# Altium PCB RGB_Matrix.PcbDoc
Units mm, origin at the board's own origin, x right, y up, seen from the top; angles counter-clockwise.
Board outline 66.5 x 59.5 mm, 2 copper layers (Top Layer, Bottom Layer); 30 components, 50 nets, 195 pads, 284 vias.
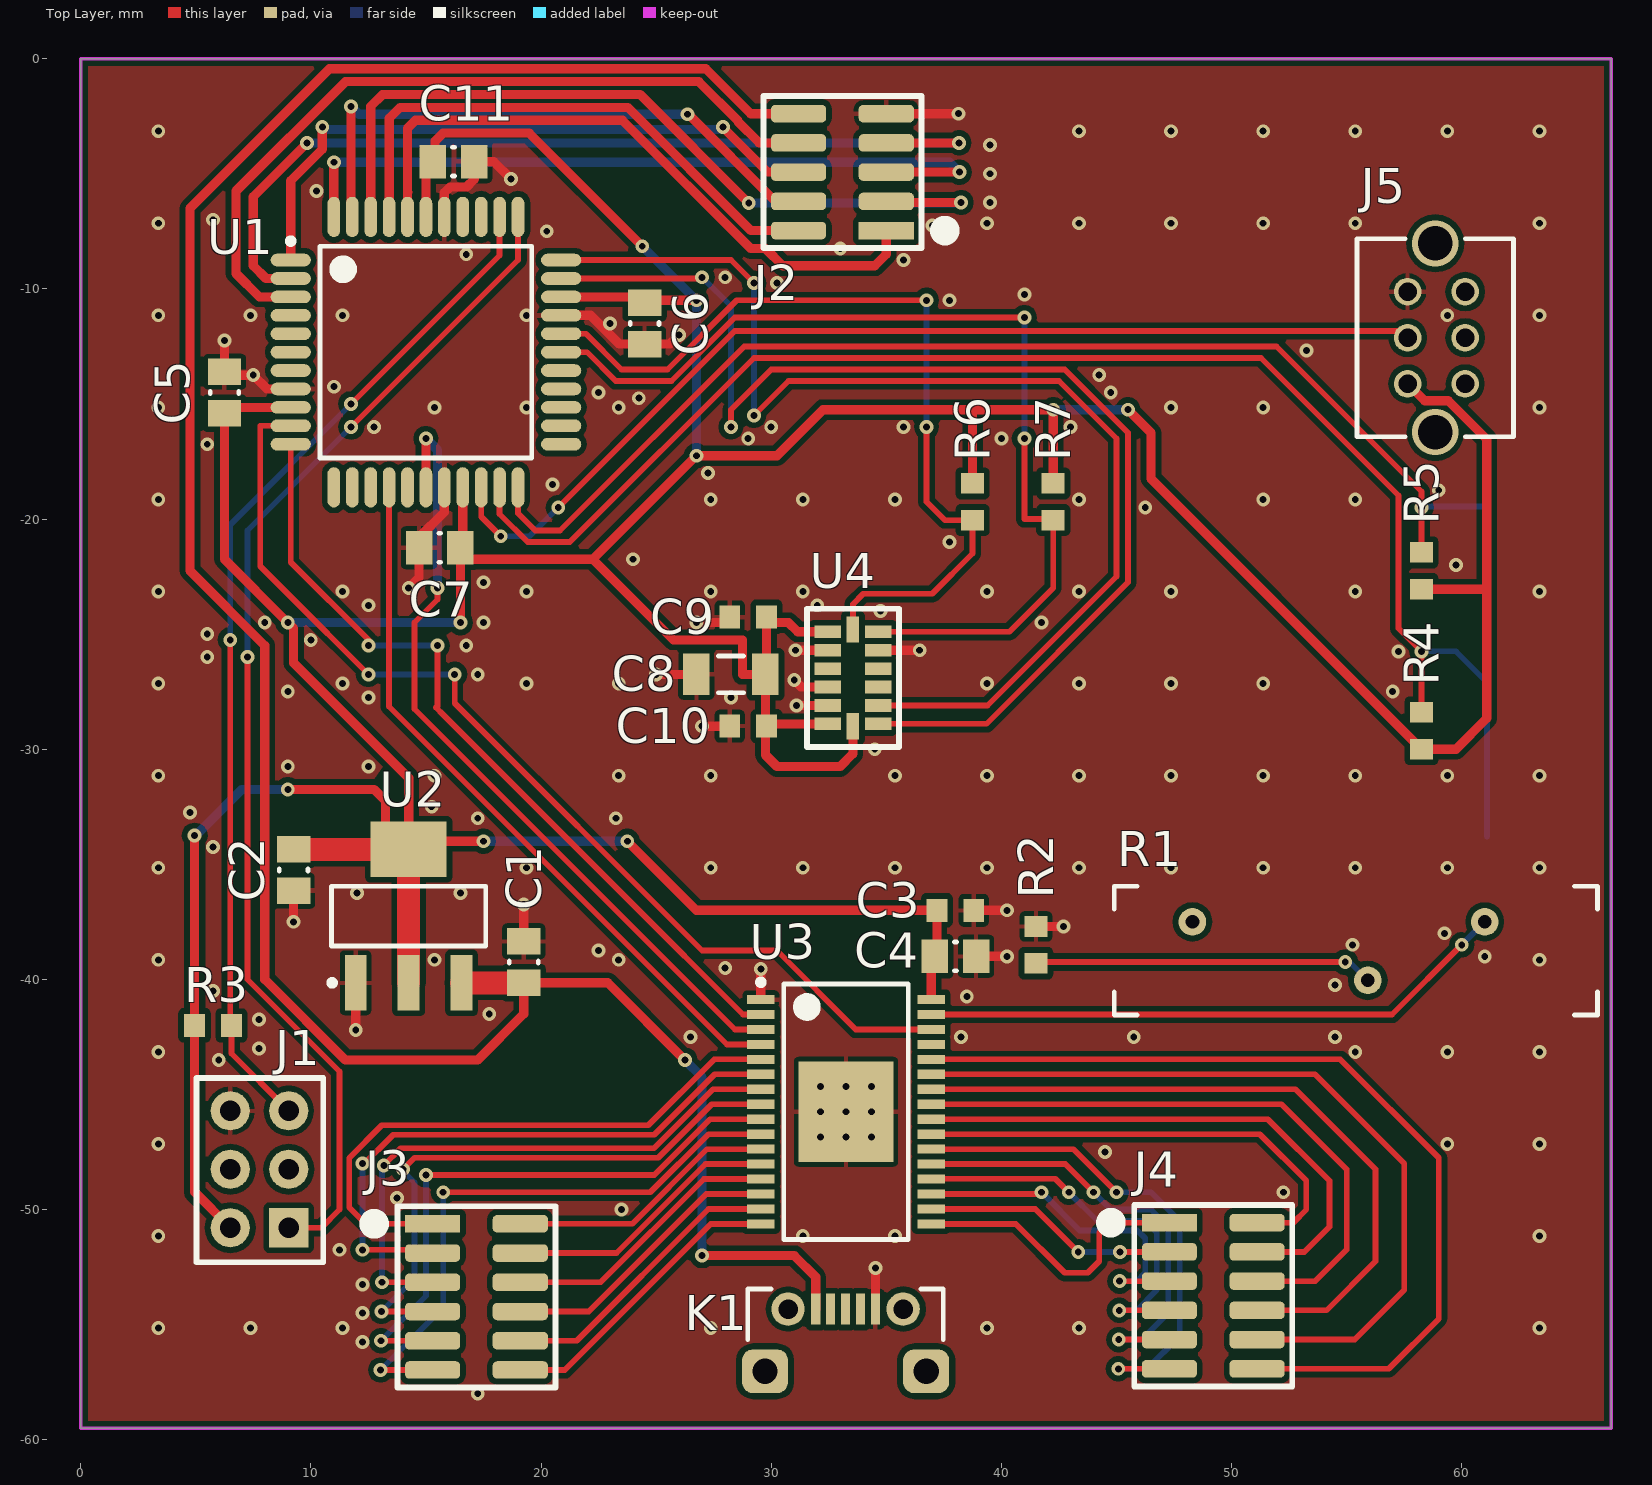
[diagram p0: Top Layer view]
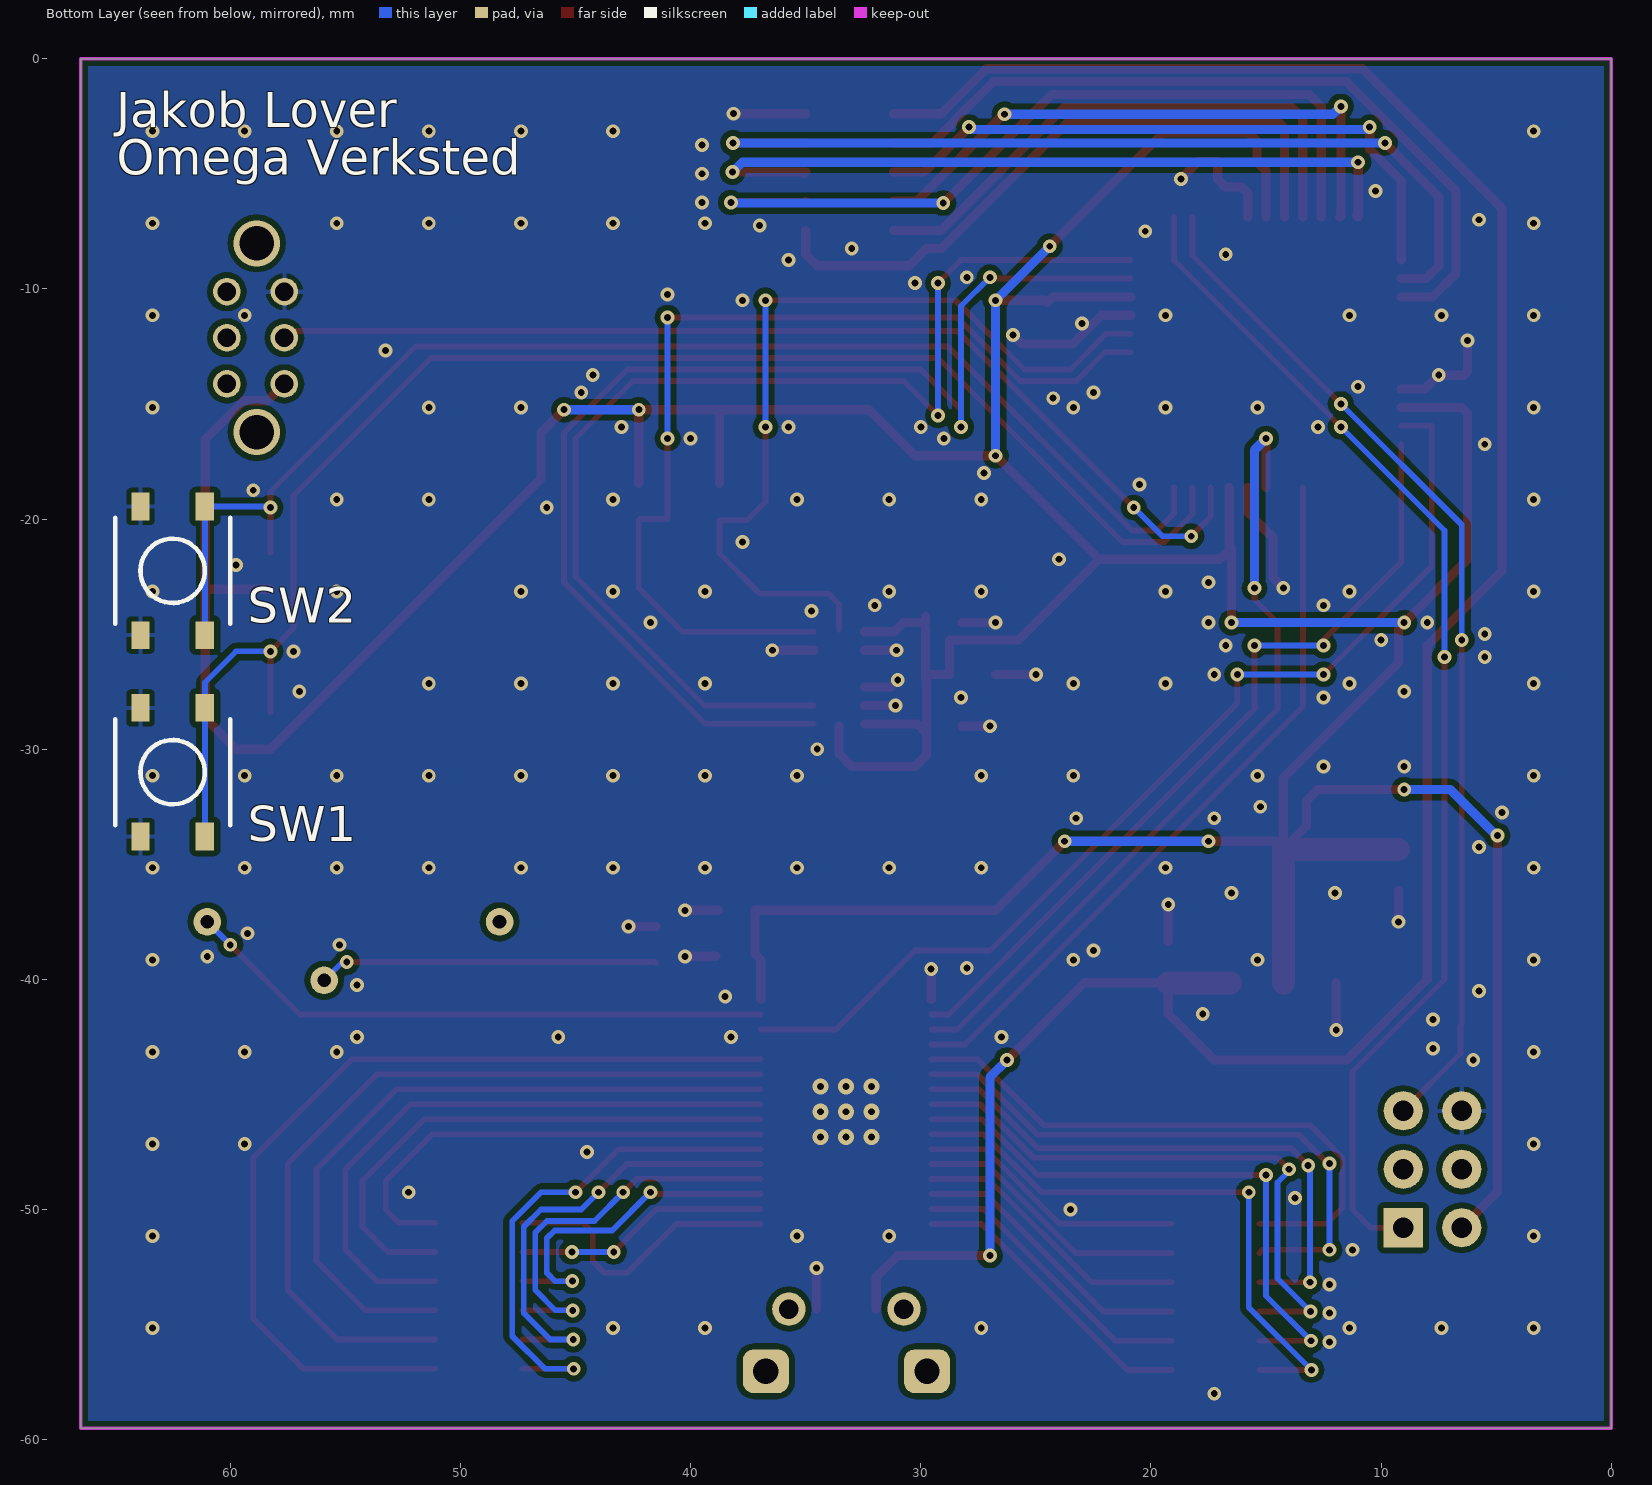
[diagram p1: Bottom Layer view, seen from below]

## Layer stack, top to bottom
Top Solder: solder mask 0.0102, Solder Resist, Dk 3.5
Top Layer: signal copper 0.0356
Dielectric 1: dielectric 0.32, FR-4, Dk 4.8
Bottom Layer: signal copper 0.0356
Bottom Solder: solder mask 0.0102, Solder Resist, Dk 3.5

## Board outline
0,-59.5 66.5,-59.5 66.5,0 0,0

## Design rules (kind name [scope] priority, off if disabled: settings)
Clearance [All] p1: gap=0.16 ignorepadtopadclearanceinfootprint=FALSE except(0: Arc-Text Arc-Hole Track-Text Track-Hole SMDPad-Text SMDPad-Hole THPad-Text THPad-Hole Via-Text Via-Hole Fill-Text Fill-Hole Poly-Text Poly-Hole Region-Text Region-Hole Text-Text Text-Hole; 0.25: Arc-Poly Track-Poly SMDPad-Poly THPad-Poly Via-Poly Fill-Poly Poly-Poly)
Height [All] p1: minheight=0 maxheight=200 prefheight=12.7
HoleSize [All] p1: absolutevalues=TRUE maxlimit=6.35 minlimit=0.3 maxpercent=80.000 minpercent=20.000
MinimumSolderMaskSliver [All] p1: minsoldermaskwidth=0.1
PlaneClearance [All] p1: clearance=1
PlaneConnect [All] p1: planeconnectstyle=Relief reliefexpansion=0.508 reliefentries=4 reliefconductorwidth=1 reliefairgap=0.254
PolygonConnect PolygonConnect_1 [IsVia] p1: connectstyle=Direct reliefconductorwidth=0.254 reliefentries=4 polygonreliefangle="90 Angle" airgapwidth=0.254
PolygonConnect [All] p2: connectstyle=Relief reliefconductorwidth=0.2 reliefentries=4 polygonreliefangle="90 Angle" airgapwidth=0.2
RoutingVias [All] p1: holewidth=0.3 width=0.6 viastyle="Through Hole" minholewidth=0.3 minwidth=0.6 maxholewidth=6.35 maxwidth=10
SilkToSolderMaskClearance [IsPad] p1: minsilkscreentomaskgap=0.155 clearancetoexposedcopper=TRUE
SolderMaskExpansion [All] p1: expansion=0.102
Width [All] p1: maxlimit=10 minlimit=0.16 preferedwidth=0.4
24 further rules are at their usual default settings.

## Components (designator, comment, footprint, x,y, rotation, side; value= is the part's Value field where it differs from the comment)
C1 "1uF" CAPC0805(2012)100_N 19.25,-39.25 r270 top
C2 "1uF" CAPC0805(2012)100_N 9.25,-35.25 r90 top
C3 "100nF" CAPC0603(1608)55_N 38,-37 r180 top
C4 "22nF" CAPC0805(2012)100_N 38,-39 r180 top
C5 "100nF" CAPC0805(2012)100_N 6.25,-14.5 r270 top
C6 "100nF" CAPC0805(2012)100_N 24.5,-11.5 r90 top
C7 "100nF" CAPC0805(2012)100_N 15.6,-21.25 r0 top
C8 "10uF" CAPC1206(3216)170_N 28.25,-26.75 r0 top
C9 "100nF" CAPC0603(1608)55_N 29,-24.25 r0 top
C10 "100nF" CAPC0603(1608)55_N 29,-29 r0 top
C11 "100nF" CAPC0805(2012)100_N 16.2,-4.475 r180 top
J1 "PDI Header" HEADER_3x2 9.04,-50.79 r90 top
J2 "2x5 SMD HEADER" "2x5 SMD HEADER" 35,-7.47 r180 top locked
J3 "2x6 SMD HEADER" "2x6 SMD HEADER" 15.29,-50.62 r0 top locked
J4 "2x6 SMD HEADER" "2x6 SMD HEADER" 47.3,-50.57 r0 top locked
J5 "Slide switch" OS202011MA0QS1 57.65,-14.125 r90 top
K1 "USB_CONNECTOR_5P" 105017-0001 33.25,-56.5 r0 top locked
R1 "Trimmepot 500ohm" TRIMPOT_3006P 55.4,-38.75 r0 top
R2 "1k6" RESC0603(1608)_N 41.5,-38.5 r270 top
R3 "100k" RESC0603(1608)_N 5.75,-42 r0 top
R4 "10k" RESC0603(1608)_N 58.25,-29.2 r270 top
R5 "10k" RESC0603(1608)_N 58.25,-22.25 r270 top
R6 "10k" RESC0603(1608)_N 38.75,-19.25 r90 top
R7 "10k" RESC0603(1608)_N 42.25,-19.25 r90 top
SW1 "Pushbutton SMD" SOIC254P500X160-4 62.5,-31 r180 bottom
SW2 "Pushbutton SMD" SOIC254P500X160-4 62.5,-22.25 r180 bottom
U1 "ATXMEGA-A4U" TQFP80P1200X1200X120-44N 15,-12.75 r0 top locked
U2 "TLV1117-33CDCYR" SOT230P700X180-4N 14.25,-37.25 r90 top
U3 "TLC5947" TLC5947 33.25,-45.75 r0 top locked
U4 "ADXL345" ADXL345 32.425,-24.9 r0 top

## Footprints (in the part's own frame and the unit in brackets; to place one, negate y for a bottom-side part, rotate by r counter-clockwise, add the part's x,y. Pads: shape width x height; smd on the part's side, far side on the other; paste and mask are expansions set on the pad)
"2x5 SMD HEADER" [mm]
  rect 2.4x0.76 smd: 1(0,0)
  rrect50% 2.4x0.76 smd: 2(3.81,0) 3(0,-1.27) 4(3.81,-1.27) 5(0,-2.54) 6(3.81,-2.54) 7(0,-3.81) 8(3.81,-3.81) 9(0,-5.08) 10(3.81,-5.08)
  silkscreen extent -2.68,-5.84 5.33,0.76
"2x6 SMD HEADER" [mm]
  rect 2.4x0.76 smd: 1(0,0)
  rrect50% 2.4x0.76 smd: 2(3.81,0) 3(0,-1.27) 4(3.81,-1.27) 5(0,-2.54) 6(3.81,-2.54) 7(0,-3.81) 8(3.81,-3.81) 9(0,-5.08) 10(3.81,-5.08) 11(0,-6.35) 12(3.81,-6.35)
  silkscreen extent -2.68,-7.11 5.33,0.76
105017-0001 [mm] "Micro USB type B"
  rrect50% 2x1.9 hole 1.1 unplated: 0(-3.517,-0.525) 0(3.483,-0.525)
  round 1.45 hole 0.85 unplated: 0(-2.517,2.175) 0(2.483,2.175)
  rect 0.4x1.35 smd: 1(-1.317,2.175) 2(-0.667,2.175) 3(-0.017,2.175) 4(0.633,2.175) 5(1.283,2.175)
  silkscreen extent -4.28,0.85 4.23,3.05, body extent -4.12,-3.07 4.08,2.33, height 2.73
ADXL345 [mm]
  rect 1.145x0.55 smd: 1(0.025,0) 2(0.025,-0.8) 3(0.025,-1.6) 4(0.025,-2.4) 5(0.025,-3.2) 6(0.025,-4) 8(2.225,-4) 9(2.225,-3.2) 10(2.225,-2.4) 11(2.225,-1.6) 12(2.225,-0.8) 13(2.225,0)
  rect 0.55x1.145 smd: 7(1.125,-4.1) 14(1.125,0.1)
  silkscreen extent -0.87,-5 3.13,1
CAPC0603(1608)55_N [mm] "Chip Capacitor, Body 1.6x0.8mm, Height 0.55mm, IPC Medium Density"
  rect 0.9x1 smd: 1(-0.8,0) 2(0.8,0)
  body extent -0.87,-0.48 0.88,0.47, height 0.55
CAPC0805(2012)100_N [mm] "Chip Capacitor, Body 2.0x1.2mm, Height 1.0mm, IPC Medium Density"
  rect 1.15x1.45 smd: 1(-0.9,0) 2(0.9,0)
  silkscreen extent -0.05,-0.62 0.05,0.63, body extent -1.1,-0.72 1.1,0.73, height 1
CAPC1206(3216)170_N [mm] "Chip Capacitor, Body 3.2x1.6mm, Height 1.7mm, IPC Medium Density"
  rect 1.15x1.8 smd: 1(-1.5,0) 2(1.5,0)
  silkscreen extent -0.55,-0.8 0.55,0.8, body extent -1.7,-0.9 1.7,0.9, height 1.7
HEADER_3x2 [mm]
  rect 1.7x1.7 hole 0.9: 1(0,0)
  round 1.7 hole 0.9: 2(0,2.54) 3(2.54,0) 4(2.54,2.54) 5(5.08,0) 6(5.08,2.54)
  silkscreen extent -1.5,-1.5 6.5,4, body extent -1.27,-1.27 6.35,3.81, height 8.45
OS202011MA0QS1 [mm] "Slide switch DPDT right angle"
  round 1.2 hole 0.8: 1(0,0) 2(2,0) 3(4,0) 4(0,-2.5) 6(4,-2.5)
  round 1.2 hole 0.8 unplated: 5(2,-2.5)
  silkscreen extent -2.3,-4.6 6.3,2.2, body extent -2.3,-8.6 6.3,2.2, height 4.8
RESC0603(1608)_N [mm] "Chip Resistor, Body 1.6x0.8mm, IPC Medium Density"
  rect 0.9x1 smd: 1(-0.8,0) 2(0.8,0)
  body extent -0.85,-0.47 0.85,0.47, height 0.6
SOIC254P500X160-4 [mm] "SMD tactile switch"
  rect 0.8x1.2 smd: 1(-1.4,2.794) 2(-1.4,-2.794) 3(1.4,2.794) 4(1.4,-2.794)
  silkscreen extent -2.5,-2.3 2.5,2.3
SOT230P700X180-4N [mm] "SOT223, 4-Leads, Body 6,7x7,3mm (max), Pitch 2,30mm, IPC Medium Density"
  rect 2.4x0.95 smd: 1(-2.9,2.3) 2(-2.9,0) 3(-2.9,-2.3)
  rect 2.4x3.3 smd: 4(2.9,0)
  silkscreen extent -3.02,-3.35 1.3,3.45, body extent -3.1,-3.31 3.83,3.19, height 1.59
TLC5947 [mm] "TSOP, 32-Leads, Body 11.00x6.10mm, Pitch 0.65mm, Thermal Pad 4.36x4.11mm, IPC High Density"
  rect 1.2x0.4 smd: 1(-3.7,4.875) 2(-3.7,4.225) 3(-3.7,3.575) 4(-3.7,2.925) 5(-3.7,2.275) 6(-3.7,1.625) 7(-3.7,0.975) 8(-3.7,0.325) 9(-3.7,-0.325) 10(-3.7,-0.975) 11(-3.7,-1.625) 12(-3.7,-2.275) 13(-3.7,-2.925) 14(-3.7,-3.575) 15(-3.7,-4.225) 16(-3.7,-4.875) 17(3.7,-4.875) 18(3.7,-4.225) 19(3.7,-3.575) 20(3.7,-2.925) 21(3.7,-2.275) 22(3.7,-1.625) 23(3.7,-0.975) 24(3.7,-0.325) 25(3.7,0.325) 26(3.7,0.975) 27(3.7,1.625) 28(3.7,2.275) 29(3.7,2.925) 30(3.7,3.575) 31(3.7,4.225) 32(3.7,4.875)
  rect 4.11x4.36 smd: 33(0,0)
  silkscreen extent -3.82,-5.55 2.7,5.75, body extent -3.1,-5.55 3.1,5.55, height 1.2
TQFP80P1200X1200X120-44N [mm] "TQFP, 44-Leads, Body 10,00x10,00mm, Pitch 0,80mm, IPC Medium Density"
  oval 1.75x0.55 smd: 1(-5.875,4) 2(-5.875,3.2) 3(-5.875,2.4) 4(-5.875,1.6) 5(-5.875,0.8) 6(-5.875,0) 7(-5.875,-0.8) 8(-5.875,-1.6) 9(-5.875,-2.4) 10(-5.875,-3.2) 11(-5.875,-4) 23(5.875,-4) 24(5.875,-3.2) 25(5.875,-2.4) 26(5.875,-1.6) 27(5.875,-0.8) 28(5.875,0) 29(5.875,0.8) 30(5.875,1.6) 31(5.875,2.4) 32(5.875,3.2) 33(5.875,4)
  oval 0.55x1.75 smd: 12(-4,-5.875) 13(-3.2,-5.875) 14(-2.4,-5.875) 15(-1.6,-5.875) 16(-0.8,-5.875) 17(0,-5.875) 18(0.8,-5.875) 19(1.6,-5.875) 20(2.4,-5.875) 21(3.2,-5.875) 22(4,-5.875) 34(4,5.875) 35(3.2,5.875) 36(2.4,5.875) 37(1.6,5.875) 38(0.8,5.875) 39(0,5.875) 40(-0.8,5.875) 41(-1.6,5.875) 42(-2.4,5.875) 43(-3.2,5.875) 44(-4,5.875)
  silkscreen extent -6,-4.6 4.6,4.95, body extent -6.01,-6.01 6.01,6.01, height 1.1
TRIMPOT_3006P [mm] "Bourns horizontal trimpot type 3006P"
  round 1.2 hole 0.6 unplated: 1(-7.1,1.25)
  round 1.2 hole 0.6: 2(0.52,-1.29) 3(5.6,1.25)
  silkscreen extent -10.5,-2.8 10.5,2.8, body extent -10.15,-2.43 10.15,2.4, height 6.55

## Part data
C1 C2: library part 3582, "X7R 50V 10%", id=3582, leverandor=Farnell, leverandor_varenr=1735541, navn=1uF, nokkelord="Kondensator, capacitor", pakke_opprettet="14-Nov-14 8:52:01 PM", pakke_opprettet_av=815, pakketype=0805, pris=4, produsent=Murata, symbol_opprettet="14-Nov-14 8:19:34 PM", symbol_opprettet_av=815
C3 C9 C10: library part 3028, "X7R 50V 5%", id=3028, leverandor=Farnell, leverandor_varenr=1759122, navn=100nF, nokkelord="Kondensator, Capacitor, CAP", pakke_opprettet="18-Feb-15 2:18:13 PM", pakke_opprettet_av=815, pakketype=0603, pris=1, produsent=Multikomp, symbol_opprettet="14-Nov-14 8:19:34 PM", symbol_opprettet_av=815
C4: library part 2446, "X7R 50V", id=2446, leverandor=Farnell, leverandor_varenr=2627092, navn=22nF, nokkelord="Capacitor Cap Kondis", pakke_opprettet="11/14/2014 8:52:01 PM", pakke_opprettet_av=815, pakketype=0805, pris=1, produsent=Multicomp, symbol_opprettet="11/14/2014 8:19:34 PM", symbol_opprettet_av=815
C5 C6 C7 C11: library part 2445, "X7R 50V", antall=50, dybde=4, hylle=13, id=2445, kolonne=3, lager_type=Fremlager, leverandor=Farnell, leverandor_varenr=2408556, navn=100nF, nokkelord="Kondensator, capacitor", pakke_opprettet="11/14/2014 8:52:01 PM", pakke_opprettet_av=815, pakketype=0805, pris=1, produsent=Multikomp, rad=1, rom=OV, symbol_opprettet="11/14/2014 8:19:34 PM", symbol_opprettet_av=815
C8: library part 3583, "X5R 50V 10%", id=3583, leverandor=Farnell, leverandor_varenr=1845762, navn=10uF, nokkelord="Kondensator, capacitor", pakke_opprettet="11-Feb-15 1:21:22 PM", pakke_opprettet_av=815, pakketype=1206, pris=6, produsent=Murata, symbol_opprettet="14-Nov-14 8:19:34 PM", symbol_opprettet_av=815
J1: library part 2407, "PDI Xmega programming header", id=2407
J5: library part 4031, "Vinklet", id=4031, leverandor=Farnell, leverandor_varenr=2435101, navn="Bryter DPDT", nokkelord="right angle slide switch", pakke_opprettet="20-Feb-17 6:08:34 PM", pakke_opprettet_av=1335, pakketype=TH, pris=0, symbol_opprettet="20-Feb-17 6:08:19 PM", symbol_opprettet_av=1335
K1: library part 4034, "Micro USB Type B", id=4034, leverandor=Farnell, leverandor_varenr=2293836, navn="USB Micro", nokkelord="USB Connector, Micro USB Type B, USB 2.0, Receptacle, 5 Ways, Surface Mount, Right Angle", pakke_opprettet="21-Feb-17 11:55:20 PM", pakke_opprettet_av=1335, pakketype=SMD, pris=0, symbol_opprettet="30-Jul-15 6:06:06 PM", symbol_opprettet_av=924
R1: library part 1365, "15 turn, horizontal", antall=50, dybde=2, hylle=7, id=1365, kolonne=1, lager_type=Fremlager, leverandor=Farnell, leverandor_varenr=9352376, navn="Trimmepot 500ohm", nokkelord=trimpot, pakke_opprettet="2/10/2017 3:29:47 PM", pakke_opprettet_av=815, pakketype=TH, pris=15, produsent=Bourns, rad=1, rom=OV, symbol_opprettet="11/3/2016 3:34:07 PM", symbol_opprettet_av=815
R2: library part 3446, "0.1W 1% Thick film resistor", antall=100, dybde=53, hylle=6, id=3446, kolonne=0, lager_type=Fremlager, navn=1k6, pakke_opprettet="7/8/2014 9:15:30 PM", pakke_opprettet_av=815, pakketype=0603, pris=0, rad=-1, rom=OV, symbol_opprettet="7/8/2014 9:16:33 PM", symbol_opprettet_av=815
R3: library part 2384, "0.1W 1% Thick film resistor", antall=100, dybde=96, hylle=6, id=2384, kolonne=0, lager_type=Fremlager, navn=100k, nokkelord=Resistor, pakke_opprettet="08.07.2014 21:15:30", pakke_opprettet_av=815, pakketype=0603, pris=0, rad=-1, rom=OV, symbol_opprettet="08.07.2014 21:16:33", symbol_opprettet_av=815
R4 R5 R6 R7: library part 2444, "0.1W 1% Thick film resistor", antall=90, dybde=72, hylle=6, id=2444, kolonne=0, lager_type=Fremlager, leverandor=Farnell, leverandor_varenr=2447230, navn=10k, nokkelord="Resistor Motstand", pakke_opprettet="08-Jul-14 9:15:30 PM", pakke_opprettet_av=815, pakketype=0603, pris=0, produsent=Multikomp, rad=-1, rom=OV, symbol_opprettet="08-Jul-14 9:16:33 PM", symbol_opprettet_av=815
SW1 SW2: library part 2413, antall=100, beskrivelse="Momentary tactile pushbutton SMD", dybde=1, hylle=6, id=2413, kolonne=1, lager_type=Fremlager, navn="Pushbutton SMD", nokkelord="smd, tactile, pushbutton, knapp, smd", pakke_opprettet="14-Nov-14 10:12:31 PM", pakke_opprettet_av=815, pakketype=SMD, pris=2, rad=5, rom=OV, symbol_opprettet="14-Nov-14 9:57:30 PM", symbol_opprettet_av=815
U1: library part 2103, antall=82, beskrivelse=Mikrokontroller, dybde=0, hylle=0, id=2103, kolonne=2, lager_type=Fremlager, navn=ATXMEGA64A4U-AU, pakke_opprettet="8/22/2014 2:00:28 PM", pakke_opprettet_av=774, pakketype=TQFP, pris=0, produsent=Atmel, rad=4, rom=OV, symbol_opprettet="8/22/2014 2:00:55 PM", symbol_opprettet_av=774
U2: library part 2386, "3,3V Low dropout regulator", antall=63, dybde=0, hylle=9, id=2386, kolonne=0, lager_type=Fremlager, leverandor=Farnell, leverandor_varenr=2447986, navn=TLV1117-33CDCYR, nokkelord=ldo, pakke_opprettet="7/11/2014 10:00:23 PM", pakke_opprettet_av=774, pakketype=SOT, pris=5, produsent="Texas Instruments", rad=2, rom=OV, symbol_opprettet="7/11/2014 10:01:42 PM", symbol_opprettet_av=774

## Via types
v1: diameter 0.6, hole 0.3, Top Layer to Bottom Layer, tented both sides, 273 vias
v2: diameter 0.7, hole 0.3, Top Layer to Bottom Layer, tented both sides, 9 vias
v3: diameter 2, hole 1.5, Top Layer to Bottom Layer, tented both sides, 2 vias

## Nets (pads, with @x,y where several pads share a name; then routed paths per layer and width w, separated by ;. In a path a pad name is that pad's centre, name@x,y a point inside that pad or via, vN(x,y) a via of type N, cw(c..) or ccw(c..) an arc to the next point about the centre after c; other vN are vias at no path point)
GND: C1.1 C2.1 C3.1 C4.1 C5.1 C6.1 C7.1 C8.1 C9.1 C10.1 C11.1 J1.6 J2.9 J5.3 K1.5 R2.1 SW1.1 SW1.2 SW2.1 SW2.2 U1.8 U1.18 U1.30 U1.38 U2.1 U3.1 U3.33 U4.2 U4.4 U4.5 U4.12 | length 46.4
  Top Layer w0.4: v1(6.25,-12.25) C5.1 6.4,-13.75 v1(7.5,-13.75) 8.1,-14.35 U1.8 ; v1(9.25,-37.5) C2.1 ; v1(11.95,-42.2) U2.1 ; v1(14.25,-23) 14.7,-22.55 C7.1 14.7,-20.8 15.8,-19.7 U1.18 ; U1.38 15.8,-5.825 16.05,-5.575 16.76,-5.575 17.1,-5.235 C11.1 17.95,-4.475 v1(18.7,-5.225) ; C1.1 v1(19.25,-36.75) ; U1.30 22.15,-11.15 23.4,-12.4 C6.1 25.6,-12.4 v1(26,-12) ; v1(25,-26.75) C8.1 ; v1(26.75,-24.5) C9.1@28.2,-24.5 ; v1(27,-29) C10.1 ; U3.1 v1(29.55,-39.55) ; v1(31,-27) 31.3,-27.3 U4.4 ; v1(31.05,-25.7) U4.2 ; v1(31.1,-28.1) U4.5 ; K1.5 v1(34.533,-52.533) ; U4.12 v1(36.45,-25.7) ; J2.9 v1(38.14,-2.39) ; C3.1 v1(40.25,-37) ; C4.1 v1(40.25,-39) ; R2.1 v1(42.7,-37.7)
  other v1: 17.25,-58 12.25,-55.75 3.375,-55.15 7.375,-55.15 11.375,-55.15 27.375,-55.15 39.375,-55.15 43.375,-55.15 63.375,-55.15 12.25,-54.5 12.25,-53.25 11.25,-51.75 3.375,-51.15 31.375,-51.15 35.375,-51.15 63.375,-51.15 23.5,-50 13.75,-49.5 52.25,-49.25 44.5,-47.5 3.375,-47.15 59.375,-47.15 63.375,-47.15 6,-43.5 3.375,-43.15 55.375,-43.15 59.375,-43.15 63.375,-43.15 7.75,-43 26.5,-42.5 38.25,-42.5 45.75,-42.5 54.5,-42.5 7.75,-41.75 17.75,-41.5 38.5,-40.75 5.75,-40.5 54.5,-40.25 28,-39.5 3.375,-39.15 15.375,-39.15 23.375,-39.15 63.375,-39.15 61,-39 22.5,-38.75 55.25,-38.5 59.25,-38 12,-36.25 16.5,-36.25 3.375,-35.15 19.375,-35.15 27.375,-35.15 31.375,-35.15 35.375,-35.15 39.375,-35.15 43.375,-35.15 47.375,-35.15 51.375,-35.15 55.375,-35.15 59.375,-35.15 63.375,-35.15 5.75,-34.25 17.25,-33 23.25,-33 4.75,-32.75 15.25,-32.5 3.375,-31.15 15.375,-31.15 23.375,-31.15 27.375,-31.15 35.375,-31.15 39.375,-31.15 43.375,-31.15 47.375,-31.15 51.375,-31.15 55.375,-31.15 59.375,-31.15 63.375,-31.15 9,-30.75 12.5,-30.75 34.5,-30 12.5,-27.75 28.25,-27.75 9,-27.5 57,-27.5 3.375,-27.15 11.375,-27.15 19.375,-27.15 23.375,-27.15 39.375,-27.15 43.375,-27.15 47.375,-27.15 51.375,-27.15 17.25,-26.75 5.5,-26 57.25,-25.75 16.75,-25.5 10,-25.25 5.5,-25 8,-24.5 17.5,-24.5 41.75,-24.5 34.75,-24 12.5,-23.75 32,-23.75 3.375,-23.15 11.375,-23.15 19.375,-23.15 27.375,-23.15 31.375,-23.15 39.375,-23.15 43.375,-23.15 47.375,-23.15 55.375,-23.15 63.375,-23.15 17.5,-22.75 59.75,-22 24,-21.75 37.75,-21 46.25,-19.5 3.375,-19.15 27.375,-19.15 31.375,-19.15 35.375,-19.15 43.375,-19.15 51.375,-19.15 55.375,-19.15 59,-18.75 20.5,-18.5 27.25,-18 5.5,-16.75 29,-16.5 40,-16.5 12.75,-16 30,-16 35.75,-16 43,-16 3.375,-15.15 15.375,-15.15 19.375,-15.15 23.375,-15.15 47.375,-15.15 51.375,-15.15 63.375,-15.15 24.25,-14.75 22.5,-14.5 44.75,-14.5 11,-14.25 44.25,-13.75 53.25,-12.675 23,-11.5 3.375,-11.15 7.375,-11.15 11.375,-11.15 19.375,-11.15 59.375,-11.15 63.375,-11.15 37.75,-10.5 41,-10.25 30.25,-9.75 28,-9.5 35.75,-8.75 16.75,-8.5 33,-8.25 20.25,-7.5 37,-7.25 3.375,-7.15 39.375,-7.15 43.375,-7.15 47.375,-7.15 51.375,-7.15 55.375,-7.15 63.375,-7.15 5.75,-7 39.5,-6.25 10.25,-5.75 39.5,-5 39.5,-3.75 3.375,-3.15 43.375,-3.15 47.375,-3.15 51.375,-3.15 55.375,-3.15 59.375,-3.15 63.375,-3.15
  other v2: 32.15,-46.85 33.25,-46.85 34.35,-46.85 32.15,-45.75 33.25,-45.75 34.35,-45.75 32.15,-44.65 33.25,-44.65 34.35,-44.65
I2C.SCL: R6.1 U1.29 U4.14 | length 37.5
  Top Layer w0.25: U1.29 21.95,-11.95 23.5,-13.5 25.5,-13.5 28.5,-10.5 v1(36.75,-10.5) ; U4.14 33.55,-23.7 34,-23.25 37,-23.25 38.75,-21.5 R6.1 37.55,-20.05 36.75,-19.25 v1(36.75,-16)
  Bottom Layer w0.25: v1(36.75,-16) v1(36.75,-10.5)
I2C.SDA: R7.1 U1.28 U4.13 | length 43.1
  Top Layer w0.25: U1.28 22,-12.75 23.25,-14 25.67,-14 28.42,-11.25 v1(41,-11.25) ; U4.13 40.35,-24.9 42.25,-23 R7.1 42.2,-20 41,-20 v1(41,-16.5)
  Bottom Layer w0.25: v1(41,-16.5) v1(41,-11.25)
LEDS.BLUE_1: J3.5 U3.7 | length 25.1
  Top Layer w0.25: v1(13.09,-53.16) J3.5 ; v1(13.17,-48.08) 13.19,-48.08 13.18,-48.07 13.91,-47.34 24.91,-47.34 27.475,-44.775 U3.7
  Bottom Layer w0.25: v1(13.09,-53.16) 13.09,-48.16 v1(13.17,-48.08)
LEDS.BLUE_2: J3.11 U3.10 | length 26
  Top Layer w0.25: v1(13.03,-56.97) J3.11 ; v1(15.75,-49.25) 24.75,-49.25 ; 24.75,-49.25 27.275,-46.725 U3.10
  Bottom Layer w0.25: v1(13.03,-56.97) 15.75,-54.25 v1(15.75,-49.25)
LEDS.BLUE_3: J3.6 U3.13 | length 12.3
  Top Layer w0.25: J3.6 22.59,-53.16 27.075,-48.675 U3.13
LEDS.BLUE_4: J3.12 U3.16 | length 13.1
  Top Layer w0.25: J3.12 21.03,-56.97 27.375,-50.625 U3.16
LEDS.BLUE_5: J4.5 U3.19 | length 15.2
  Top Layer w0.25: U3.19 41.825,-49.325 v1(41.75,-49.25) ; v1(45.14,-53.11) J4.5
  Bottom Layer w0.25: v1(41.75,-49.25) 43.405,-50.905 45.905,-50.905 46.25,-51.25 46.25,-52.75 45.89,-53.11 v1(45.14,-53.11)
LEDS.BLUE_6: J4.11 U3.22 | length 22.6
  Top Layer w0.25: U3.22 43.125,-47.375 v1(45,-49.25) ; v1(45.08,-56.92) J4.11
  Bottom Layer w0.25: v1(45,-49.25) 46.5,-49.25 47.75,-50.5 47.75,-55.5 46.33,-56.92 v1(45.08,-56.92)
LEDS.BLUE_7: J4.6 U3.25 | length 27.2
  Top Layer w0.25: U3.25 52.175,-45.425 55,-48.25 55,-51.75 53.64,-53.11 J4.6
LEDS.BLUE_8: J4.12 U3.28 | length 39.6
  Top Layer w0.25: U3.28 54.725,-43.475 59,-47.75 59,-54.75 56.83,-56.92 J4.12
LEDS.GREEN_1: J3.3 U3.6 | length 25.9
  Top Layer w0.25: v1(12.25,-51.75) 15.15,-51.75 J3.3 ; v1(12.25,-48) 12.25,-48.08 13.58,-46.75 24.92,-46.75 27.545,-44.125 U3.6
  Bottom Layer w0.25: v1(12.25,-51.75) v1(12.25,-48)
LEDS.GREEN_2: J3.9 U3.9 | length 25.8
  Top Layer w0.25: v1(13.05,-55.7) J3.9 ; v1(15,-48.5) 24.92,-48.5 27.345,-46.075 U3.9
  Bottom Layer w0.25: v1(13.05,-55.7) 15,-53.75 v1(15,-48.5)
LEDS.GREEN_3: J3.4 U3.12 | length 12.1
  Top Layer w0.25: J3.4 23.28,-51.89 27.145,-48.025 U3.12
LEDS.GREEN_4: J3.10 U3.15 | length 12.8
  Top Layer w0.25: J3.10 21.55,-55.7 27.275,-49.975 U3.15
LEDS.GREEN_5: J4.3 U3.18 | length 11.1
  Top Layer w0.25: U3.18 41.475,-49.975 v1(43.34,-51.84) ; v1(45.16,-51.84) J4.3
  Bottom Layer w0.25: v1(43.34,-51.84) v1(45.16,-51.84)
LEDS.GREEN_6: J4.9 U3.21 | length 20
  Top Layer w0.25: U3.21 42.775,-48.025 v1(44,-49.25) ; v1(45.1,-55.65) J4.9
  Bottom Layer w0.25: v1(44,-49.25) 44.75,-50 46.5,-50 47.25,-50.75 47.25,-54.5 46.1,-55.65 v1(45.1,-55.65)
LEDS.GREEN_7: J4.4 U3.24 | length 24
  Top Layer w0.25: U3.24 51.575,-46.075 54.25,-48.75 54.25,-50.75 53.16,-51.84 J4.4
LEDS.GREEN_8: J4.10 U3.27 | length 34.9
  Top Layer w0.25: U3.27 53.625,-44.125 57.5,-48 57.5,-53.5 55.35,-55.65 J4.10
LEDS.RED_1: J3.1 U3.5 | length 25.8
  Top Layer w0.25: J3.1 12.37,-50.62 11.665,-49.915 11.665,-47.758 13.083,-46.34 24.66,-46.34 27.525,-43.475 U3.5 U3.5@29.525,-43.5
LEDS.RED_2: J3.7 U3.8 | length 25.9
  Top Layer w0.25: v1(13.07,-54.43) J3.7 ; v1(14,-48.25) 14.5,-47.75 25.09,-47.75 27.415,-45.425 U3.8
  Bottom Layer w0.25: v1(13.07,-54.43) 14.5,-53 14.5,-48.827 14,-48.327 v1(14,-48.25)
LEDS.RED_3: J3.2 U3.11 | length 11.8
  Top Layer w0.25: J3.2 23.97,-50.62 27.215,-47.375 U3.11
LEDS.RED_4: J3.8 U3.14 | length 12.6
  Top Layer w0.25: J3.8 22.07,-54.43 27.175,-49.325 U3.14
LEDS.RED_5: J4.1 U3.17 | length 12.9
  Top Layer w0.25: U3.17 40.625,-50.625 42.75,-52.75 43.75,-52.75 44.25,-52.25 44.25,-51 44.68,-50.57 J4.1
LEDS.RED_6: J4.7 U3.20 | length 17.4
  Top Layer w0.25: U3.20 36.96,-48.665 42.345,-48.665 v1(42.93,-49.25) ; v1(45.12,-54.38) J4.7
  Bottom Layer w0.25: v1(42.93,-49.25) 44.175,-50.495 46.245,-50.495 46.75,-51 46.75,-53.5 45.87,-54.38 v1(45.12,-54.38)
LEDS.RED_7: J4.2 U3.23 | length 20.8
  Top Layer w0.25: U3.23 51.225,-46.725 53.25,-48.75 53.25,-50 52.68,-50.57 J4.2
LEDS.RED_8: J4.8 U3.26 | length 30.8
  Top Layer w0.25: U3.26 52.775,-44.775 56.25,-48.25 56.25,-52.25 54.12,-54.38 J4.8
NetJ1_1: J1.1 U1.34 | length 52.2
  Top Layer w0.25: v1(7.25,-26) 7.25,-40 11.25,-44 11.25,-50 10.46,-50.79 J1.1 ; v1(11.75,-16) 19,-8.75 U1.34
  Bottom Layer w0.25: v1(7.25,-26) 7.25,-20.5 v1(11.75,-16)
NetJ1_5: J1.5 R3.2 U1.35 | length 44.7
  Top Layer w0.25: v1(6.5,-25.25) 6.5,-41.95 R3.2 6.55,-43.22 J1.5 ; v1(11.75,-15) 18.2,-8.55 U1.35
  Bottom Layer w0.25: v1(6.5,-25.25) 6.5,-20.25 v1(11.75,-15)
NetJ5_2: J5.2 U1.20 | length 45.7
  Top Layer w0.25: U1.20 17.4,-19.9 v1(18.25,-20.75) ; v1(20.75,-19.5) 28.415,-11.835 57.36,-11.835 J5.2
  Bottom Layer w0.25: v1(18.25,-20.75) 19.5,-20.75 v1(20.75,-19.5)
NetR1_2: R1.2 R2.2 | length 14.8
  Top Layer w0.25: R2.2 41.55,-39.25 v1(54.94,-39.25)
  Bottom Layer w0.25: v1(54.94,-39.25) 55.13,-39.25 R1.2
NetR1_3: R1.3 U3.31 | length 25.7
  Top Layer w0.25: U3.31 56.975,-41.525 v1(60,-38.5)
  Bottom Layer w0.25: v1(60,-38.5) R1.3
NetR4_1: R4.1 SW1.3 SW1.4 U1.21 | length 66.4
  Top Layer w0.25: U1.21 18.2,-19.78 19.42,-21 21.25,-21 29.25,-13 51.275,-13 57.25,-18.975 57.25,-24.75 v1(58.25,-25.75) R4.1
  Bottom Layer w0.25: v1(58.25,-25.75) 59.75,-25.75 61.1,-27.1 SW1.3 SW1.4
NetR5_1: R5.1 SW2.3 SW2.4 U1.22 | length 57.7
  Top Layer w0.25: U1.22 19,-19.75 19.75,-20.5 20.827,-20.5 28.827,-12.5 51.95,-12.5 58.25,-18.8 v1(58.25,-19.5) R5.1
  Bottom Layer w0.25: v1(58.25,-19.5) 58.294,-19.456 SW2.3 SW2.4
NetU1_10: U1.10 U3.30 | length 45.6
  Top Layer w0.25: U1.10 7.8,-15.95 7.8,-22.05 9,-23.25 v1(12.5,-26.75) ; v1(16.25,-26.75) 16.25,-28 27,-38.75 30.25,-38.75 33.675,-42.175 U3.30
  Bottom Layer w0.25: v1(12.5,-26.75) v1(16.25,-26.75)
NetU1_11: U1.11 U3.2 | length 35.5
  Top Layer w0.25: U1.11 9.125,-21.875 12.5,-25.25 v1(12.5,-25.5) ; v1(15.5,-25.5) 15.5,-28.13 15.44,-28.19 15.75,-28.5 23.75,-36.5 28.775,-41.525 U3.2
  Bottom Layer w0.25: v1(12.5,-25.5) v1(15.5,-25.5)
NetU1_15: U1.15 U3.4 | length 31.8
  Top Layer w0.25: U1.15@13.41,-18.635 U1.15 13.4,-28.15 28.075,-42.825 U3.4
NetU1_17: U1.17 U3.3 | length 35.3
  Top Layer w0.25: v1(15.5,-23) 15.5,-23.5 14.5,-24.5 14.5,-28.25 28.425,-42.175 U3.3
  Top Layer w0.4: U1.17 v1(15,-16.5)
  Bottom Layer w0.4: v1(15,-16.5) 15.5,-17 v1(15.5,-23)
NetU1_32: U1.32 U4.8 | length 52.9
  Top Layer w0.25: U1.32 26.95,-9.55 v1(27,-9.5) ; v1(28.25,-16) 28.25,-15.25 30,-13.5 42.75,-13.5 45.5,-16.25 45.5,-22.75 39.35,-28.9 U4.8
  Bottom Layer w0.25: v1(27,-9.5) 28.25,-10.75 v1(28.25,-16)
NetU1_33: U1.33 U4.9 | length 50.6
  Top Layer w0.25: U1.33 28.25,-8.75 v1(29.25,-9.75) ; v1(29.25,-15.5) 30.75,-14 42.5,-14 45,-16.5 45,-22.5 39.4,-28.1 U4.9
  Bottom Layer w0.25: v1(29.25,-15.5) v1(29.25,-9.75)
ROWS.ROW_1: J2.1 U1.40 | length 28.7
  Top Layer w0.4: U1.40 14.2,-5.8 ; 14.216,-5.8 14.2,-5.8 ; J2.1 35,-8.5 34.5,-9 30.5,-9 29.75,-8.25 29.108,-8.25 23.534,-2.676 14.549,-2.676 14.2,-3.025 14.2,-5.8
ROWS.ROW_2: J2.2 U1.41 | length 24.5
  Top Layer w0.4: U1.41 13.41,-6.865 13.41,-2.59 13.884,-2.116 23.766,-2.116 29.12,-7.47 J2.2
ROWS.ROW_3: J2.3 U1.42 | length 35.9
  Top Layer w0.4: U1.42 12.6,-2.075 13.119,-1.556 24.306,-1.556 v1(29.025,-6.275) ; J2.3 35.05,-6.25 v1(38.25,-6.25)
  Bottom Layer w0.4: v1(29.025,-6.275) 38.225,-6.275 v1(38.25,-6.25)
ROWS.ROW_4: J2.4 U1.43 | length 26
  Top Layer w0.4: v1(11.75,-2.075) 11.75,-6.825 U1.43 ; v1(26.36,-2.415) v1@26.383,-2.392 ; v1@26.425,-2.35 v1@26.383,-2.392 ; J2.4 31.18,-6.19 30.182,-6.19 v1@26.383,-2.392
  Bottom Layer w0.4: v1(11.75,-2.075) 12.09,-2.415 v1(26.36,-2.415)
ROWS.ROW_5: J2.5 U1.44 | length 33.1
  Top Layer w0.4: U1.44 11.07,-6.805 11,-6.735 v1(11,-4.5) ; J2.5@35.07,-5 J2.5 v1(38.18,-4.93)
  Bottom Layer w0.4: v1(11,-4.5) 37.75,-4.5 v1(38.18,-4.93)
ROWS.ROW_6: J2.6 U1.1 | length 27.9
  Top Layer w0.4: U1.1 9.125,-5.308 10.5,-3.933 v1(10.5,-2.975) ; v1(27.9,-2.975) 29.855,-4.93 J2.6
  Bottom Layer w0.4: v1(10.5,-2.975) 10.6,-3.075 27.8,-3.075 v1(27.9,-2.975)
ROWS.ROW_7: J2.7 U1.2 | length 39.6
  Top Layer w0.4: U1.2 8.05,-9.55 7.5,-9 7.5,-6 v1(9.84,-3.66) ; J2.7 v1(38.16,-3.66)
  Bottom Layer w0.4: v1(9.84,-3.66) v1(38.16,-3.66)
ROWS.ROW_8: J2.8 U1.3 | length 33.9
  Top Layer w0.4: U1.3 7.766,-10.35 6.75,-9.334 6.75,-5.75 11.504,-0.996 26.855,-0.996 28.56,-2.702 28.56,-2.735 29.485,-3.66 J2.8
VCC: C1.2 J2.10 K1.1 U2.3 | length 106.1
  Top Layer w0.4: v1(26.25,-43.5) 22.9,-40.15 C1.2 19.25,-41.5 17.25,-43.5 11.5,-43.5 8,-40 8,-25.5 4.75,-22.25 4.75,-6.5 10.814,-0.436 27.161,-0.436 29.115,-2.39 J2.10 ; v1(27,-52) 31,-52 31.933,-52.933 K1.1
  Top Layer w1: U2.3 C1.2
  Bottom Layer w0.4: v1(26.25,-43.5) 27,-44.25 v1(27,-52)
VCC_P3V3: C2.2 C3.2 C4.2 C5.2 C6.2 C7.2 C8.2 C9.2 C10.2 C11.2 J1.2 J5.1 R3.1 R4.2 R5.2 R6.2 R7.2 U1.9 U1.19 U1.31 U1.39 U2.2 U2.4 U3.32 U4.1 U4.6 U4.7 | length 246.5
  Top Layer w0.4: v1(4.95,-33.75) R3.1 4.95,-49.24 J1.2 ; v1(9,-31.75) 12.75,-31.75 13.25,-32.25 13.25,-33.35 U2.4 ; U1.9 6.5,-15.15 C5.2 6.25,-21.75 v1(9,-24.5) 9.25,-24.75 9.25,-26.25 14.25,-31.25 U2.4 ; U1.39 15,-4.875 15.4,-4.475 15.4,-3.575 15.739,-3.236 19.486,-3.236 v1(24.4,-8.15) ; v1(16.5,-24.5) C7.2 ; U1.19 16.6,-21.15 C7.2 ; v1(17.5,-34) 14.6,-34 U2.4 ; U1.31 24.25,-10.35 C6.2 24.6,-10.5 v1(26.75,-10.5) ; v1(23.75,-34) 26.75,-37 C3.2 37.2,-38.9 C4.2 36.95,-39.15 U3.32 ; C8.2 28.75,-26.75 28.75,-25.25 25.75,-25.25 22.25,-21.75 ; C10.2@29.8,-29.25 30.15,-28.9 U4.6 ; C9.2@29.8,-24.75 29.8,-26.95 29.75,-27 29.75,-30.25 30.25,-30.75 33,-30.75 33.55,-30.2 U4.7 ; C9.2 29.8,-24.5 30.75,-24.5 31.15,-24.9 U4.1 ; R6.2 38.75,-15.25 ; R7.2 v1(42.25,-15.25) 38.75,-15.25 ; v1(45.5,-15.25) 46.5,-16.25 46.5,-18.25 R4.2 59.75,-30 61.09,-28.66 61.09,-23 ; J5.1 58.39,-14.865 59.415,-14.865 61.09,-16.54 61.09,-23 ; R5.2 61.04,-23.05 61.09,-23 ; C7.2 17,-21.75 22.25,-21.75 ; 22.25,-21.75 v1(26.75,-17.25) 30.25,-17.25 32.25,-15.25 38.75,-15.25
  Top Layer w1: C2.2 U2.4 U2.2
  Bottom Layer w0.4: v1(4.95,-33.75) 5,-33.75 7,-31.75 v1(9,-31.75) ; v1(9,-24.5) v1(16.5,-24.5) ; v1(17.5,-34) v1(23.75,-34) ; v1(24.4,-8.15) v1(26.75,-10.5) v1(26.75,-17.25) ; v1(42.25,-15.25) v1(45.5,-15.25)
pads on no net: J1.3 J1.4 J5.4 J5.5 J5.6 K1.0 K1.2 K1.3 K1.4 R1.1 U1.4 U1.5 U1.6 U1.7 U1.12 U1.13 U1.14 U1.16 U1.23 U1.24 U1.25 U1.26 U1.27 U1.36 U1.37 U3.29 U4.3 U4.10 U4.11
copper on no net:
  other v3: 58.85,-16.225 58.85,-8.025

## Polygon pours and split planes (outlines as drawn)
GND on Bottom Layer "Bottom Layer-No Net" (solid, remove dead copper, pour order 8): 0,0 0,-59.5 66.5,-59.5 66.5,0
GND on Top Layer "Bottom Layer-No Net" (solid, remove dead copper, pour order 6): 0,0 0,-59.5 66.5,-59.5 66.5,0

## Keep-outs
Keep-Out Layer:
  the board outline again, w0.152

## Other copper
Top Layer:
  pour cut-out: 8.5,-35 8.5,-35.73 10,-35.73 10,-34.75
  pour cut-out: 12.75,-31.291 13.15,-30.725 13.975,-31.5 13.85,-32.275
  pour cut-out: 13.65,-24.225 14.375,-24.2 14.25,-28.525 13.782,-27.992
  pour cut-out: 15.7,-25.175 16.375,-24.7 16.175,-23.15 14.8,-23.925 14.55,-25.475

## Silkscreen, mask and mechanical layers (free items; w line width, h text height)
Bottom Overlay:
  text "Jakob Lover" at 64.95,-2.975 h1.52
  text "Omega Verksted" at 64.925,-5.05 h1.52
Top Solder:
  rectangle: 28.85,-50.925 30.25,-40.575
  rectangle: 36.25,-50.925 37.65,-40.575
  rectangle: 31.775,-29.275 33.125,-24.525
  rectangle: 31.775,-29.275 35.325,-28.525
  rectangle: 33.975,-29.275 35.325,-24.525
  rectangle: 31.775,-28.525 34.25,-28.325
  rectangle: 31.775,-25.475 35.325,-24.525
  rectangle: 11.15,-7.6 19.1,-6.125
  region: 9.875,-16.875 9.875,-8.925 8.4,-8.925 8.4,-16.875
  region: 18.8,-17.875 10.85,-17.875 10.85,-19.35 18.8,-19.35
  region: 20.15,-8.825 20.15,-16.775 21.625,-16.775 21.625,-8.825
  rectangle: 31.625,-55.1 34.825,-53.55
  rectangle: 31.5,-54.55 34.975,-54.125